# Altium PCB LineInjectorSimplePCB.PcbDoc
Units mm, origin at the board's own origin, x right, y up, seen from the top; angles counter-clockwise.
Board outline 87.5 x 80 mm, 2 copper layers (Top Layer, Bottom Layer); 35 components, 16 nets, 91 pads, 128 vias.
Unrouted connection lines stored in the file: 2.
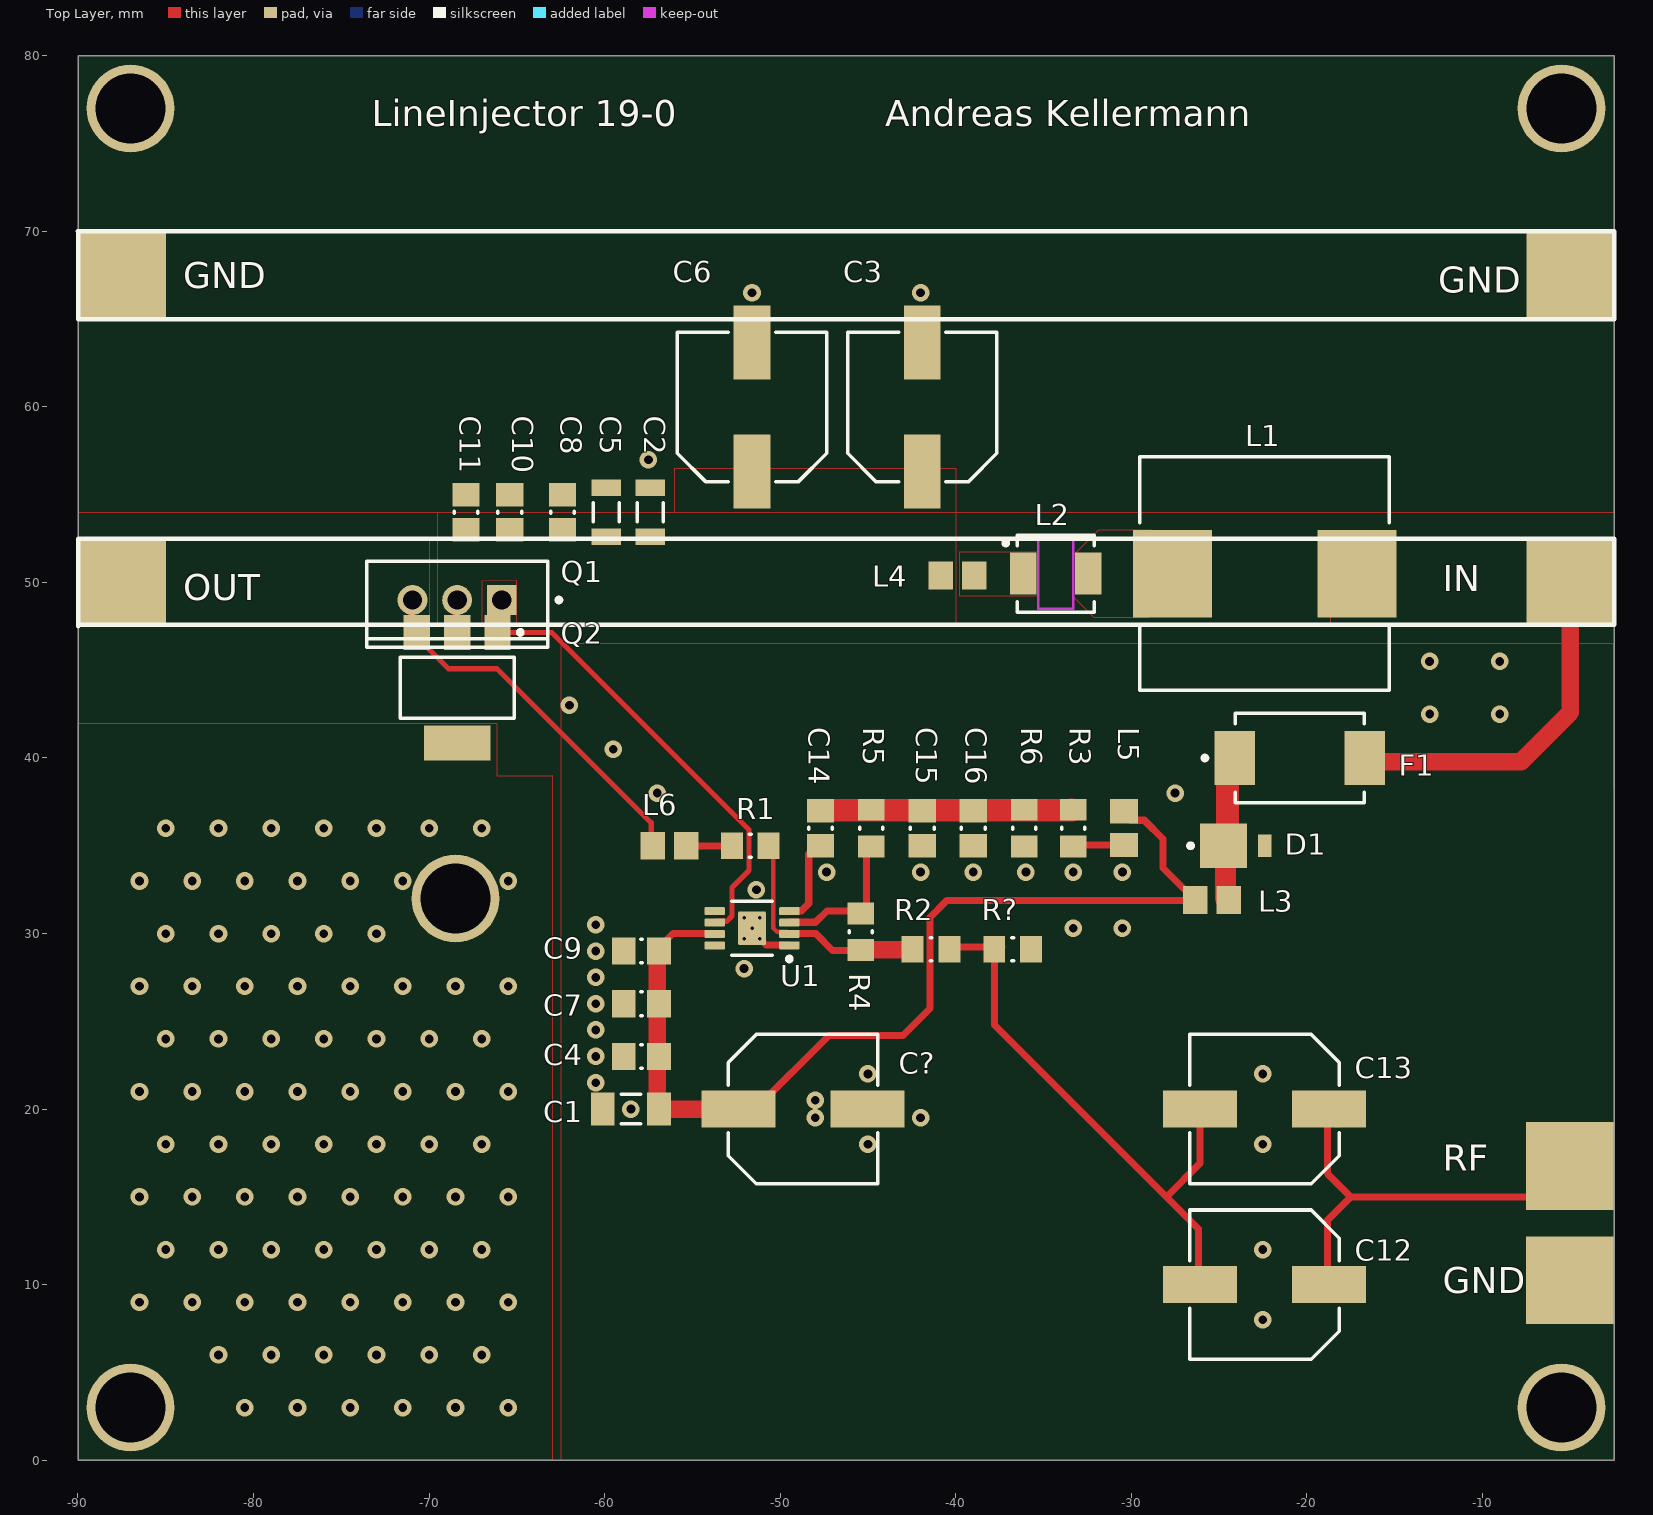
[diagram p0: Top Layer view]
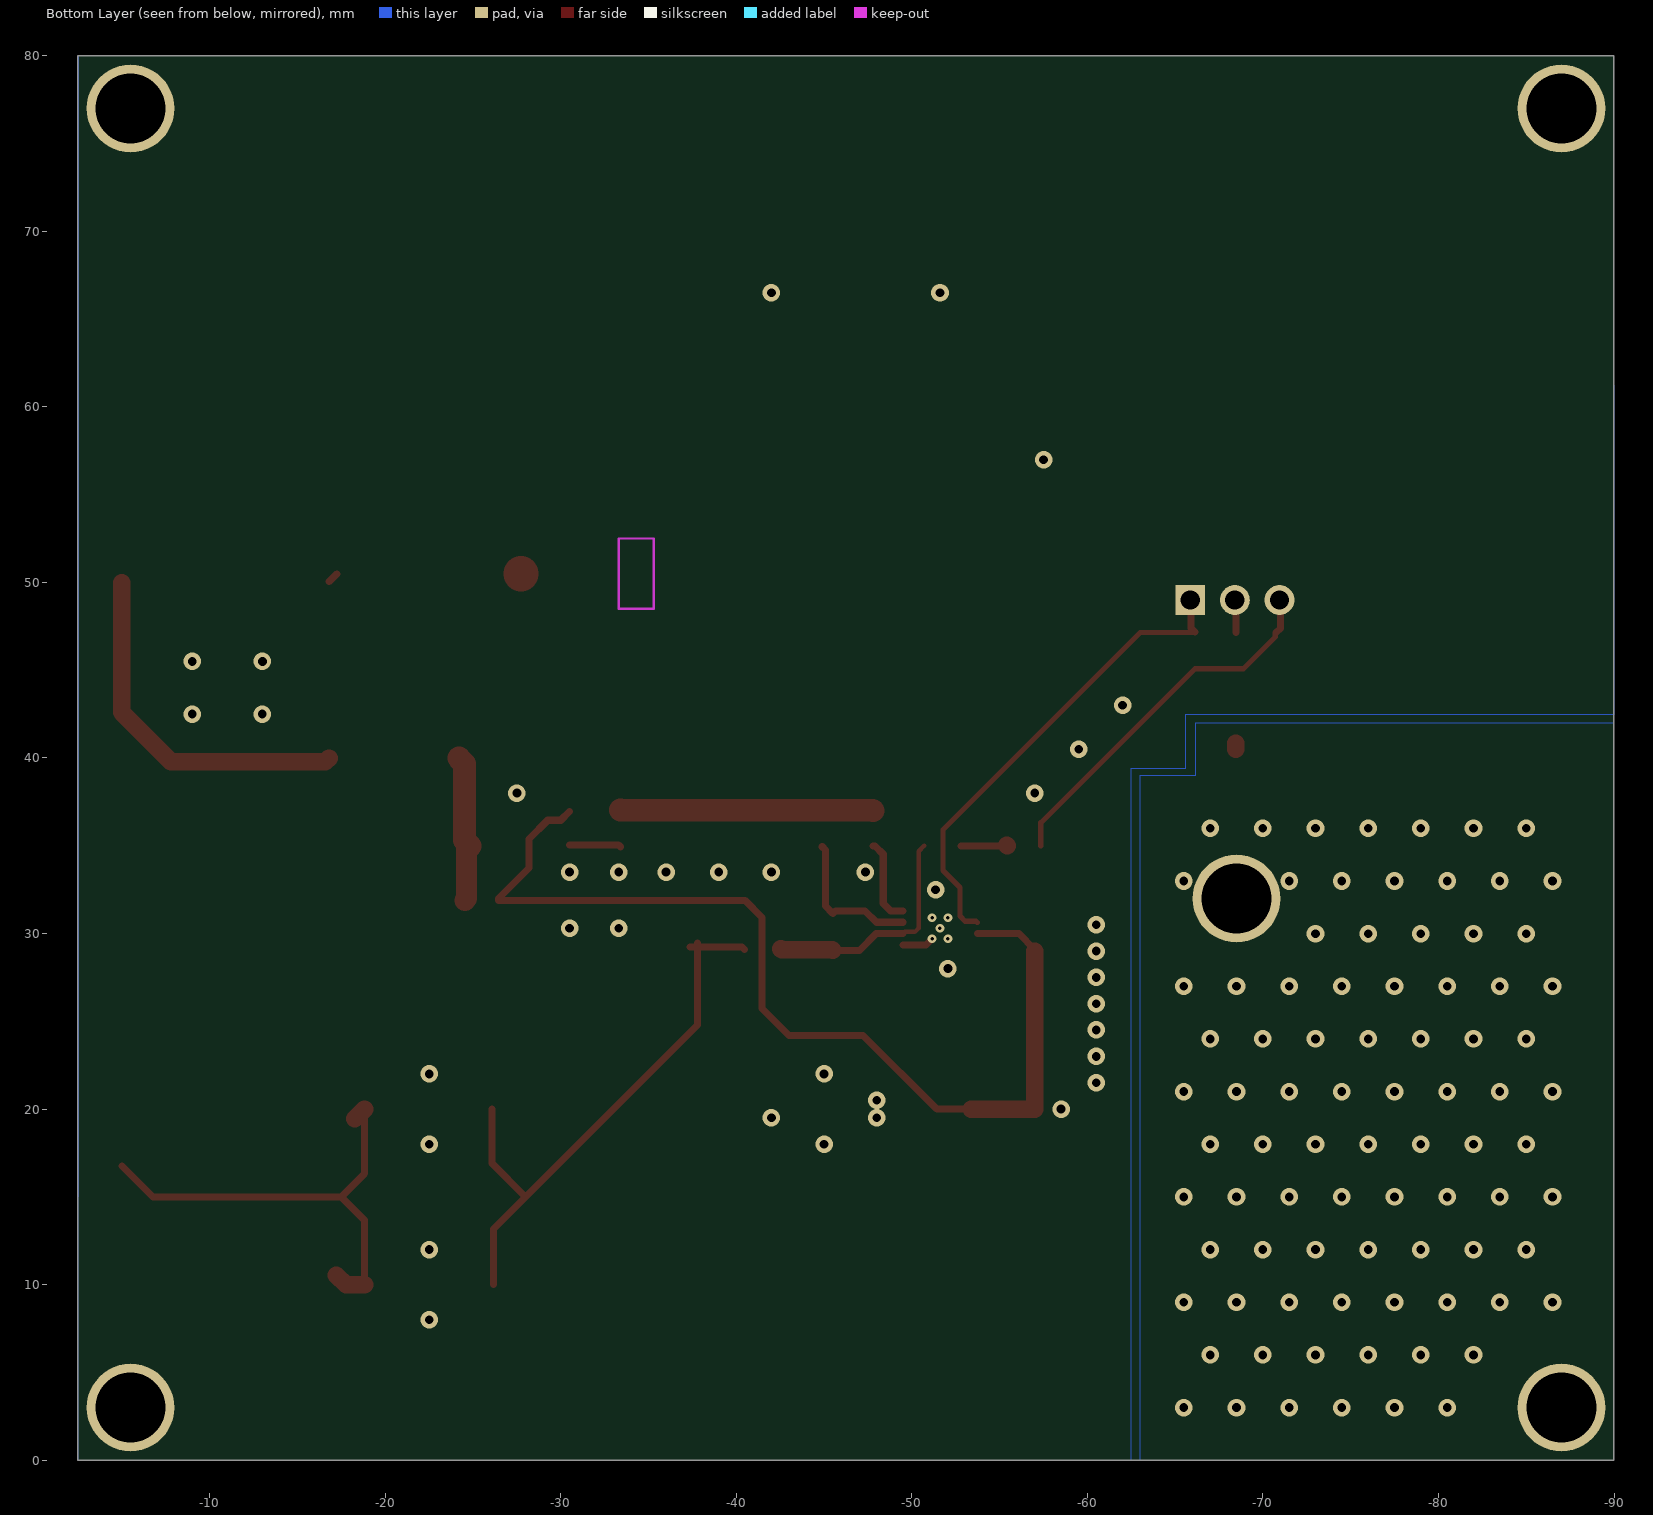
[diagram p1: Bottom Layer view, seen from below]

## Layer stack, top to bottom
Top Solder: solder mask 0.0102, Solder Resist, Dk 3.5
Top Layer: signal copper 0.0356
Dielectric 1: dielectric 0.32, FR-4, Dk 4.8
Bottom Layer: signal copper 0.0356
Bottom Solder: solder mask 0.0102, Solder Resist, Dk 3.5

## Board outline
-2.493,79.993 -2.493,39.993 -2.493,-0.007 -89.993,-0.007 -89.993,79.993

## Design rules (kind name [scope] priority, off if disabled: settings)
Clearance [All] p1: gap=0.2 ignorepadtopadclearanceinfootprint=FALSE
PlaneConnect [All] p1: planeconnectstyle=Direct reliefexpansion=0.508 reliefentries=4 reliefconductorwidth=0.254 reliefairgap=0.254
PolygonConnect [All] p1: connectstyle=Direct reliefconductorwidth=0.254 reliefentries=4 polygonreliefangle="90 Angle" airgapwidth=0.254
RoutingVias [All] p1: holewidth=0.4 width=0.7 viastyle="Through Hole" minholewidth=0.4 minwidth=0.7 maxholewidth=1 maxwidth=2
SolderMaskExpansion [All] p1: expansion=0.102
Width [All] p1: maxlimit=10 minlimit=0.254 preferedwidth=0.254
29 further rules are at their usual default settings.

## Components (designator, comment, footprint, x,y, rotation, side; value= is the part's Value field where it differs from the comment)
C1 "10uF" CAPC1206(3216)130_M -58.5,20 r180 top
C2 "10uF" CAPC1206(3216)130_L -57.4,54 r90 top
C3 "EEE-FK1E221P" PNSC-EEE-FK1E221P_N -41.9,60 r90 top
C4 "1uF" CAPC0805(2012)75_M -57.9,23 r0 top value=10nF
C5 "10uF" CAPC1206(3216)130_L -59.9,54 r90 top
C6 "EEE-FK1E221P" PNSC-EEE-FK1E221P_N -51.6,60 r90 top
C7 "100nF" CAPC0805(2012)75_M -57.9,26 r0 top value=10nF
C8 "1uF" CAPC0805(2012)75_M -62.4,54 r270 top value=10nF
C9 "10nF" CAPC0805(2012)75_M -57.9,29 r0 top
C10 "100nF" CAPC0805(2012)75_M -65.4,54 r270 top value=10nF
C11 "10nF" CAPC0805(2012)75_M -67.9,54 r270 top
C12 "EEE-FK1E221P" PNSC-EEE-FK1E221P_N -22.4,10 r180 top
C13 "220uF" PNSC-EEE-FK1E221P_N -22.4,20 r180 top
C14 "10nF" CAPC0805(2012)75_M -47.7,36 r90 top
C15 "100nF" CAPC0805(2012)75_M -41.9,36 r90 top value=10nF
C16 "1uF" CAPC0805(2012)75_M -39,36 r90 top value=10nF
C? "EEE-FK1E221P" PNSC-EEE-FK1E221P_N -48.7,20 r0 top
D1 "MBRM120LT3" ONSC-POWERMITE-2-457-04_D_V -23.4,35 r0 top
F1 "0ZCF0110FF2C" TECO-SMD100F-2_V -20.4,40 r0 top
L1 "7443550101" WE-HCI-1350 -22.4,50.5 r0 top
L2 "744373240010" "WE-LHMI 4020" -34.3,50.5 r0 top
L3 "0805" INDC2013X105X50ML20T30 -25.4,31.9 r0 top
L4 "0805" INDC2013X105X50ML20T30 -39.9,50.4 r0 top
L5 "0805" INDC2013X105X50ML20T30 -30.4,36 r90 top
L6 "0805" INDC2013X105X50ML20T30 -56.3,35 r180 top
Q1 "2SB1259" ONSC-TO-220-3-221A-09 -68.4,49 r270 top
Q2 "BSP19AT1" ONSC-SOT-223-4-318E-04_V -68.4,44 r270 top
R1 "1k" RESC0805(2012)_M -51.7,35 r180 top value="1780.00 Ohm"
R2 "1k" RESC0805(2012)_M -41.4,29.1 r180 top value="1780.00 Ohm"
R3 "1k" RESC0805(2012)_M -33.3,36 r270 top value="1780.00 Ohm"
R4 "open" RESC0805(2012)_M -45.4,30.1 r270 top value="1780.00 Ohm"
R5 "1k" RESC0805(2012)_M -44.8,36 r270 top value="1780.00 Ohm"
R6 "1k" RESC0805(2012)_M -36.1,36 r90 top value="1780.00 Ohm"
R? "49" RESC0805(2012)_M -36.75,29.1 r180 top value="1780.00 Ohm"
U1 "THS3120IDGN" DGN0008D_L -51.6,30.3 r180 top

## Footprints (in the part's own frame and the unit in brackets; to place one, negate y for a bottom-side part, rotate by r counter-clockwise, add the part's x,y. Pads: shape width x height; smd on the part's side, far side on the other; paste and mask are expansions set on the pad)
CAPC0805(2012)75_M [mm] "Chip Capacitor, Body 2.0x1.2mm, Height 0.75mm, IPC Low Density"
  rect 1.35x1.55 smd: 1(-1,0) 2(1,0)
  silkscreen extent -0.05,-0.67 0.05,0.67, body extent -1.1,-0.72 1.1,0.72, height 0.75
CAPC1206(3216)130_L [mm] "Chip Capacitor, Body 3.2x1.6mm, Height 1.3mm, IPC High Density"
  rect 0.95x1.7 smd: 1(-1.4,0) 2(1.4,0)
  silkscreen extent -0.55,-0.75 0.55,0.75, body extent -1.7,-0.9 1.7,0.9, height 1.3
CAPC1206(3216)130_M [mm] "Chip Capacitor, Body 3.2x1.6mm, Height 1.3mm, IPC Low Density"
  rect 1.35x1.9 smd: 1(-1.6,0) 2(1.6,0)
  silkscreen extent -0.55,-0.85 0.55,0.85, body extent -1.7,-0.9 1.7,0.9, height 1.3
DGN0008D_L [mm] "TSOP, 8-Leads, Body 3.1x3.1mm, Pitch 0.65mm, Thermal Pad 1.89x1.57mm, IPC High Density"
  rrect22% 1.15x0.45 smd: 1(-2.125,0.975) 2(-2.125,0.325) 3(-2.125,-0.325) 4(-2.125,-0.975) 5(2.125,-0.975) 6(2.125,-0.325) 7(2.125,0.325) 8(2.125,0.975)
  rrect6% 1.57x1.89 smd: 9(0,0)
  silkscreen extent -2.25,-1.55 1.15,1.87, body extent -2.45,-1.5 2.45,1.5, height 0.94
INDC2013X105X50ML20T30 [mm] "Chip Inductor, 2-Leads, Body 2.2x1.45mm, IPC Low Density"
  rect 1.39x1.59 smd: 1(-0.955,0) 2(0.955,0)
  body extent -1.1,-0.72 1.1,0.72, height 1.05
ONSC-POWERMITE-2-457-04_D_V [mm] "POWERMITE, 2-Leads, Body 1.965x1.9mm"
  rect 2.67x2.54 smd: 1(-1.335,0)
  rect 0.762x1.27 smd: 2(1.016,0)
  silkscreen extent -3.34,-0.12 -3.09,0.12, body extent -2.04,-0.95 -0.08,0.95, height 1.15
ONSC-SOT-223-4-318E-04_V [mm] "SOT223, 4-Leads, Body 6.5x3.5mm, Pitch 2.3mm"
  rect 2x1.5 smd: 1(-3.15,2.3) 2(-3.15,0) 3(-3.15,-2.3)
  rect 2x3.8 smd: 4(3.15,0)
  silkscreen extent -3.27,-3.25 1.75,3.73, body extent -1.75,-3.25 1.75,3.25, height 1.75
ONSC-TO-220-3-221A-09 [mm] "FM, 3-Leads, Body 10.3x4.85mm, Pitch 2.54mm"
  rect 1.7x1.7 hole 1.1: 1(0,2.54)
  round 1.7 hole 1.1: 2(0,0) 3(0,-2.54)
  silkscreen extent -2.2,-5.15 2.7,5.93, body extent -2.18,-5.15 2.67,5.15, height 19.85
PNSC-EEE-FK1E221P_N [mm] "CAPAE, 2-Leads, Dia 8mm, Body Length 10.5mm, IPC Medium Density"
  rect 4.2x2.1 smd: 1(-3.675,0) 2(3.675,0)
  silkscreen extent -4.25,-4.25 4.25,4.25, body extent -5,-4.25 5,4.25, height 10.5
RESC0805(2012)_M [mm] "Chip Resistor, Body 2.0x1.3mm, IPC Low Density"
  rect 1.25x1.5 smd: 1(-1.05,0) 2(1.05,0)
  silkscreen extent -0.05,-0.65 0.05,0.65, body extent -1.1,-0.67 1.1,0.67, height 0.7
TECO-SMD100F-2_V [mm] "SMD, 2-Leads, Body 7.34x5.12mm"
  rect 2.3x3.1 smd: 1(-3.7,0) 2(3.7,0)
  silkscreen extent -5.52,-2.56 3.68,2.56, body extent -3.67,-2.56 3.67,2.56, height 3
WE-HCI-1350 [mm] "Inductor, 2-Leads, Body 13.0 x 12.8 mm"
  rect 4.5x5 smd: 1(-5.25,0) 2(5.25,0)
  silkscreen extent -7.1,-6.65 7.1,6.65, body extent -7,-6.4 7,6.4, height 4.99
"WE-LHMI 4020" [mm] "SMD Inductor, 2-Leads, Body 4.45 x 4.06mm"
  rect 1.5x2.4 smd: 1(-1.85,0) 2(1.85,0)
  Keep-Out Layer lines w0.127: -1,-2 -1,2 1,2 1,-2 -1,-2
  silkscreen extent -2.97,-2.2 2.2,2.2, body extent -2.22,-2.03 2.23,2.03, height 1.8

## Part data
C1 C2 C5: library part CMP-1037-04970-1, Case-EIA=1206, Case-Metric=3216, Rated Voltage="10 V", Tolerance="-20% to +80%", Max Thickness="1.3 mm", Technology=SMT
C3 C6 C12 C?: library part CMP-1665-00017-1, "CAP ALUM 220UF 20% 25V SMD", Datasheet=http://industrial.panasonic.com/cdbs/www-data/pdf/RDE0000/ABA0000C1181.pdf, PartNumber=EEE-FK1E221P
C4 C7 C8 C9 C10 C11 C14 C15 C16: library part CMP-1036-03812-1, Case-EIA=0805, Case-Metric=2012, Rated Voltage="10 V", Tolerance="-20% to +80%", Max Thickness="0.75 mm", Technology=SMT
C13: library part CMP-1665-00017-1, "CAP ALUM 220UF 20% 25V SMD EEE-FK1E221P", PartNumber=EEE-FK1E221P, Datasheet=http://industrial.panasonic.com/cdbs/www-data/pdf/RDE0000/ABA0000C1181.pdf
D1: library part CMP-1055-00282-1, "Schottky Power Rectifier, 2-Pin Powermite, Tape and Reel", Manufacturer="On Semiconductor", ComponentLink1Description="Manufacturer URL", ComponentLink1URL=http://www.onsemi.com/, ComponentLink2Description=Datasheet, ComponentLink2URL=http://www.onsemi.cn/pub_link/Collateral/MBRM120L-D.PDF, ComponentLink3Description="Package Specification", ComponentLink3URL=http://www.onsemi.com/pub_link/Collateral/457-04.PDF, Configuration=Single, DatasheetVersion="Rev. 7", IFSM Max (A)=50, Mounting Technology="Surface Mount", Note1=0, PackageDescription="2-Pin POWERMITE, Body 1.965 x 1.9 mm", PackageReference=POWERMITE-2-457-04, PackageVersion="Rev. F, 05/2013", Packing="Tape and Reel", PartNumber=MBRM120LT3, RoHS=FALSE
F1: library part CMP-2000-05420-1, "ptc", Hold Current=1.1A, Manufacturer=TEConnectivity/CircuitProtection, Maximum Current Rating=40A, Maximum Initial Resistance=N/A, Maximum Post Trip Resistance=0.48Ohm, Maximum Voltage Rating=30V, Minimum Initial Resistance=0.12Ohm, Operating Temperature=85(Max)C, Package/Case=2920, Package Description="2-Pin Surface Mount Device, Body 7.34 x 5.12 mm", Package Reference=SMD100F-2, Trip Current=2.2A, Typical Power Dissipation=1.7(Max)W, Agency Approvals=CSA/TUV/UL, Applications=N/A, Datasheet URL=http://datasheet.octopart.com/SMD100F-2-Tyco-Electronics-datasheet-11085073.pdf, Datasheet Version=May-11, Dimension=N/A, Family=SMD, Lead Diameter=N/R, Manufacturer URL=http://www.te.com/, Maximum Trip Time=N/A, Mounting=SurfaceMount, Number of Terminals=2, Packaging=TapeandReel, Part No=SMD100F-2, RoHS=Yes, Seated Plane Height=N/R, Terminal Pitch=N/A, Wire Form=N/R
L1: library part CMP-0226-00031-1, "SMD Flat Wire High Current Inductor WE-HCI, L=10.0 µH", Inductance="10.0 µH", ComponentLink1Description="Manufacturer Link", ComponentLink1URL=http://www.we-online.com, ComponentLink2Description=Datasheet, ComponentLink2URL=http://www.we-online.de/katalog/media/pdf/7443550101.pdf, DatasheetVersion="ver 1, Aug-2009", PackageDescription="Inductor, 2-Leads, Body 13.0 x 12.8 mm", PackageReference=WE-HCI-1350, PackageVersion=2008
L2: library part CMP-1353-00038-1, "SMD Power Inductor WE-LHMI, L=0.10 µH", Inductance="0.10 µH", Manufacturer="Wuerth Elektronik", ComponentLink1Description="Manufacturer URL", ComponentLink1URL=http://www.we-online.com, ComponentLink2Description=Datasheet, ComponentLink2URL=http://katalog.we-online.de/kataloge/eisos/media/pdf/744373240010.pdf, PackageReference="WE-LHMI 4020", PartNumber=744373240010
L3 L4 L5 L6: library part CMP-1660-00003-1, Case Code (Metric)=2012, Current Rating="6 A", Max Operating Temperature="125 degC", Min Operating Temperature="-40 degC", Package Quantity=1, Resistance="4 mohm", Tolerance=30%, Case\Package=0805, Case Code (Imperial)=0805, ComponentLink1Description="Manufacturer URL", ComponentLink1URL=http://www.t-yuden.com/, ComponentLink2Description=Datasheet, ComponentLink2URL=http://ds.yuden.co.jp/TYCOMPAS/ut/detail.do?productNo=FBMJ2125HM210NT&fileName=FBMJ2125HM210NT_SS&mode=specSheetDownload, Core Material=Ferrite, DatasheetVersion=08/2016, Height="0.85 mm", Impedance="21 Ohm", Length="2 mm", Max Current Rating="6 A", Mount="Surface Mount", Mounting Technology="Surface Mount", PackageDescription="2-Pin Surface Mount Device, Body 2 x 1.25 mm", PackageReference=0805, Packaging="Tape and Reel", REACH SVHC=Unknown, RoHSCompliant=true, Width="1.25 mm"
Q1: library part CMP-1031-00034-1, Manufacturer="On Semiconductor", PartNumber=MJE5740G, ComponentLink1Description="Manufacturer URL", ComponentLink1URL=http://www.onsemi.com/, ComponentLink2Description=Datasheet, ComponentLink2URL=http://www.onsemi.com/pub_link/Collateral/MJE5740-D.PDF, ComponentLink3Description="Package Specification", ComponentLink3URL=http://www.onsemi.com/pub_link/Collateral/221A-09.PDF, DatasheetVersion="Rev. 11", IC Continuous (A)=8, Mounting Technology="Through Hole", PackageDescription="3-Pin Flange Mount, Vertical Straight Lead, Body 9.97 x 4.445 mm, Pitch 2.54 mm", PackageReference=TO-220-3-221A-09, PackageVersion="Rev. AG, 09/2011", Packing=Tube, Polarity=NPN, RoHS=TRUE
Q2: library part CMP-1048-00457-1, "NPN Silicon Expitaxial Transistor, 4-Pin SOT-223, Tape and Reel", Manufacturer="On Semiconductor", ComponentLink1Description="Manufacturer URL", ComponentLink1URL=http://www.onsemi.com/, ComponentLink2Description=Datasheet, ComponentLink2URL=http://www.onsemi.com/pub_link/Collateral/BSP19AT1-D.PDF, ComponentLink3Description="Package Specification", ComponentLink3URL=http://www.onsemi.com/pub_link/Collateral/318E-04.PDF, DatasheetVersion="Rev. 11", fT Min (MHz)=70, IC Continuous (A)=0.1, Mounting Technology="Surface Mount", PackageDescription="4-Pin Small Outline Transistor, Body 6.5 x 3.5 mm, Pitch 2.3 mm", PackageReference=SOT-223-4-318E-04, PackageVersion="Rev. N, 08/2009", Packing="Tape and Reel", PartNumber=BSP19AT1, Polarity=NPN, RoHS=FALSE
R1 R2 R3 R5 R6 R?: library part CMP-1013-00536-1, "1k 1%", Case-EIA=0805, Case-Metric=2012, Power="0.125 W", Tolerance="1 %", Technology=SMT
R4: library part CMP-1013-00536-1, Case-EIA=0805, Case-Metric=2012, Power="0.125 W", Tolerance="1 %", Technology=SMT
U1: library part CMP-0018-00648-2, "Single, Low Noise, High Output Drive, 475 mA Current-Feedback Amplifier with Power-Down, 10 to 30 V, -40 to 85 degC, 8-pin SOP (DGN8), Green (RoHS & no Sb/Br)", Manufacturer="Texas Instruments", 2nd Harmonic(dBc)=51, 3rd Harmonic(dBc)=50, @ MHz=10, Acl, min stable gain(V/V)=1, BW @ Acl(MHz)=130, Code_JEDEC=MO-187, ComponentLink1Description="Manufacturer URL", ComponentLink1URL=http://www.ti.com/, ComponentLink2Description=Datasheet, ComponentLink2URL=http://www.ti.com/general/docs/lit/getliterature.tsp?genericPartNumber=THS3120&fileType=pdf, ComponentLink3Description="Package Specification", ComponentLink3URL=http://www.ti.com/litv/pdf/mpds046e, DatasheetVersion=SLOS420E, Diff Gain(%)=0.007, Diff Phase(deg)=0.018, Eco-Plan="Green (RoHS & no Sb/Br)", Iib(Max)(nA)=20000, Io(Typ)(mA)=475, Iq per channel(Max)(mA)=11, Mounting Technology="Surface Mount", Number of Channels=1, PackageDescription="8-pin Plastic Small Outline, Body 3 x 3 mm, Pitch 0.65 mm", PackageReference=DGN0008D, PackageVersion="4073271/F, 05/2011", PartNumber=THS3120IDGN, Settling Time (0.1%)(Typ)(ns)=11, Slew Rate(Typ)(V/us)=1700, Sub Family="High Output Current Amplifier (>=50mA), High Speed Amplifier (>=50MHz), High Supply Voltage Amplifier (>=30V)", THD (Fc is 1 MHz)(Typ)(dB)=-78, Vio(Max)(mV)=8, Vn at Flatband(Typ)(nV/rtHz)=2.5, Vs(Max)(V)=30, Vs(Min)(V)=10

## Free pads (board coordinates)
  round 5 hole 4: 1(-68.493,31.993) 6(-5.493,2.993) 7(-87,2.993) 8(-87,77) 9(-5.493,77)
  rect 5x5 smd: 1(-4.993,49.993) 2(-4.993,67.493) 3(-5,10.25) 3(-5,16.75) 4(-87.493,67.493) 5(-87.493,49.993)

## Via types
v1: diameter 1, hole 0.5, Top Layer to Bottom Layer, tented both sides, 123 vias
v2: diameter 0.5, hole 0.2, Top Layer to Bottom Layer, tented both sides, 5 vias

## Nets (pads, with @x,y where several pads share a name; then routed paths per layer and width w, separated by ;. In a path a pad name is that pad's centre, name@x,y a point inside that pad or via, vN(x,y) a via of type N, cw(c..) or ccw(c..) an arc to the next point about the centre after c; other vN are vias at no path point)
AC_Input: C12.1 C13.1 pad.3@-5,16.75 | length 26.9
  Top Layer w0.4: C12.1@-18.818,9.993 -18.818,13.668 -17.493,14.993 ; C13.1@-18.818,19.993 -18.818,16.318 -17.493,14.993 ; pad.3@-5,16.75 -6.757,14.993 -17.493,14.993
  Top Layer w1: C12.1@-18.818,9.993 -17.768,9.993 C12.1@-17.218,10.543 ; C13.1@-18.818,19.993 C13.1@-18.268,19.443
GND: C1.2 C2.2 C3.2 C4.1 C5.2 C6.2 C7.1 C8.1 C9.1 C10.1 C11.1 C14.1 C15.1 C16.1 C?.2 D1.2 pad.2 pad.3@-5,10.25 pad.4 pad.6 pad.7 pad.8 pad.9 R6.1 R?.1 U1.1 U1.4 U1.8 U1.9 | length 6.7
  Top Layer w0.4: U1.9@-51.168,29.718 -50.793,29.343 U1.1@-49.493,29.343 ; U1.4@-49.493,31.293 -48.793,31.293 -48.368,31.718 -48.368,34.518 -47.893,34.993 C14.1@-47.793,34.993
  other v1: -22.5,8 -22.5,11.993 -45,18 -22.5,17.993 -48,19.5 -42,19.5 -58.5,20 -48,20.5 -60.5,21.5 -45,22 -22.5,22 -60.5,23 -60.5,24.509 -60.5,26 -60.5,27.5 -52.05,28 -60.5,29 -33.3,30.3 -30.5,30.3 -60.5,30.5 -51.35,32.5 -47.35,33.5 -42,33.5 -39,33.5 -36,33.5 -33.3,33.5 -30.5,33.5 -57,38 -27.5,38 -59.5,40.5 -12.993,42.5 -9,42.5 -62,43 -13,45.5 -9,45.5 -57.5,56.993 -51.6,66.5 -42,66.5
  other v2: -52.05,29.7 -51.15,29.7 -51.6,30.3 -52.05,30.9 -51.15,30.9
NetC1_1: C1.1 C4.2 C7.2 C9.2 C?.1 L3.1 L5.2 U1.7 | length 58.4
  Top Layer w0.4: C9.2@-56.993,28.993 -56.993,29.093 -56.093,29.993 U1.7@-53.743,29.993 ; C?.1@-53.37,19.993 -52.468,19.993 -51.418,19.993 -47.218,24.193 -42.993,24.193 -41.468,25.718 -41.468,30.918 -40.493,31.893 -26.448,31.893 -26.448,31.993 -28.193,33.738 -28.193,35.393 -29.253,36.453 -29.998,36.453 L5.2@-30.493,36.948
  Top Layer w1: C9.2@-56.993,28.993 -56.993,22.993 -56.993,19.993 C?.1@-53.37,19.993
NetC2_1: C2.1 C3.1 C5.1 C6.1 C8.2 C10.2 C11.2 L4.1 pad.1@-68.493,31.993 Q1.2 Q2.2 Q2.4 | length 2.2
  Top Layer w0.4: Q2.2@-68.453,47.143 Q1.2@-68.453,48.993
  Top Layer w1: Q2.4@-68.453,40.493 Q2.4@-68.453,40.843
  other v1: -80.493,2.993 -77.493,2.993 -74.493,2.993 -71.493,2.993 -68.493,2.993 -65.493,2.993 -81.993,5.993 -78.993,5.993 -75.993,5.993 -72.993,5.993 -69.993,5.993 -66.993,5.993 -86.493,8.993 -83.493,8.993 -80.493,8.993 -77.493,8.993 -74.493,8.993 -71.493,8.993 -68.493,8.993 -65.493,8.993 -84.993,11.993 -81.993,11.993 -78.993,11.993 -75.993,11.993 -72.993,11.993 -69.993,11.993 -66.993,11.993 -86.493,14.993 -83.493,14.993 -80.493,14.993 -77.493,14.993 -74.493,14.993 -71.493,14.993 -68.493,14.993 -65.493,14.993 -84.993,17.993 -81.993,17.993 -78.993,17.993 -75.993,17.993 -72.993,17.993 -69.993,17.993 -66.993,17.993 -86.493,20.993 -83.493,20.993 -80.493,20.993 -77.493,20.993 -74.493,20.993 -71.493,20.993 -68.493,20.993 -65.493,20.993 -84.993,23.993 -81.993,23.993 -78.993,23.993 -75.993,23.993 -72.993,23.993 -69.993,23.993 -66.993,23.993 -86.493,26.993 -83.493,26.993 -80.493,26.993 -77.493,26.993 -74.493,26.993 -71.493,26.993 -68.493,26.993 -65.493,26.993 -84.993,29.993 -81.993,29.993 -78.993,29.993 -75.993,29.993 -72.993,29.993 -86.493,32.993 -83.493,32.993 -80.493,32.993 -77.493,32.993 -74.493,32.993 -71.493,32.993 -68.493,32.993 -65.493,32.993 -84.993,35.993 -81.993,35.993 -78.993,35.993 -75.993,35.993 -72.993,35.993 -69.993,35.993 -66.993,35.993
NetC12_2: C12.2 C13.2 R2.1 R?.2 | length 33
  Top Layer w0.4: R2.1@-40.468,29.093 -40.318,29.243 R?.2@-38.036,29.243 ; R?.2@-37.793,29.457 R?.2@-37.793,29.225 ; R?.2@-37.357,29.232 -37.357,29.225 R?.2@-37.793,29.225 ; C12.2@-26.168,9.993 -26.168,13.168 -27.993,14.993 ; C13.2 -26.075,16.911 -27.993,14.993 ; R?.2@-37.793,29.225 -37.793,24.793 -27.993,14.993
NetC14_2: C14.2 C15.2 C16.2 R3.1 R5.1 R6.2 | length 14.4
  Top Layer w1.3: C14.2@-47.793,36.993 -47.768,37.018 -33.418,37.018 R3.1@-33.393,37.043
NetD1_1: D1.1 F1.1 L3.2 | length 8.5
  Top Layer w1.2: D1.1@-24.828,34.993 -24.633,34.798 -24.633,31.988 L3.2@-24.538,31.893
  Top Layer w1.3: D1.1@-24.828,34.993 -24.511,35.31 -24.511,39.675 F1.1@-24.193,39.993
NetL1_1: L1.1 L2.2 | length 0
NetL2_1: L2.1 L4.2
NetL5_1: L5.1 R3.2 | length 2.9
  Top Layer w0.4: R3.2@-33.393,34.943 -33.298,35.038 L5.1@-30.493,35.038
NetL6_1: L6.1 R1.2 | length 2.7
  Top Layer w0.4: L6.1@-55.434,34.993 R1.2@-52.795,34.993
  Top Layer w1: L6.1@-55.434,34.993 L6.1@-55.409,35.018
NetQ1_1: Q1.1 Q2.1 U1.6 | length 27.3
  Top Layer w0.3: Q2.1 -63.011,47.15 -51.77,35.908 -51.77,33.585 -52.735,32.62 -52.735,30.999 -53.034,30.7 -53.65,30.7 U1.6
  Top Layer w0.4: Q2.1@-66.123,47.173 -65.913,47.383 Q1.1@-65.913,48.993
NetR1_1: R1.1 R2.2 R4.2 U1.2 | length 13.2
  Top Layer w0.254: R1.1@-50.695,34.993 -50.395,34.693 -50.395,30.311 -50.174,30.091 -49.591,30.091 U1.2@-49.493,29.993
  Top Layer w0.4: U1.2@-49.493,29.993 -47.968,29.993 -47.018,29.043 R4.2@-45.493,29.043
  Top Layer w1: R4.2@-45.493,29.043 -45.455,29.08 -42.581,29.08 -42.543,29.118 R2.2@-42.518,29.143
NetR4_1: R4.1 R5.2 U1.3 | length 8.4
  Top Layer w0.4: U1.3@-49.493,30.643 -47.981,30.643 -47.331,31.293 -45.643,31.293 -45.493,31.143 -45.068,31.568 -45.068,34.768 R5.2@-44.893,34.943
Power_Input: F1.2 L1.2 pad.1@-4.993,49.993 | length 21.1
  Top Layer w0.4: L1.2@-17.243,50.493 L1.2@-16.793,50.043
  Top Layer w1: F1.2@-16.793,39.993 -16.593,39.793 -7.793,39.793 -4.993,42.593 pad.1@-4.993,49.993
Power_Output: L6.2 pad.5 Q1.3 Q2.3 | length 21.3
  Top Layer w0.3: Q2.3 -70.7,46.9 -68.885,45.085 -66.123,45.085 -57.344,36.306 L6.2@-57.344,34.993
  Top Layer w0.4: Q1.3@-70.993,48.993 -70.993,47.383 Q2.3@-70.753,47.143
pads on no net: U1.5

## Polygon pours and split planes (outlines as drawn)
GND on Top Layer "Top Layer-GND" (solid, remove dead copper, shelved, pour order 20): -2.5,46.5 -62.5,46.5 -62.5,0 -2.493,0 -2.493,30
NetC1_1 on Top Layer "Top Layer-NetC1_1" (solid, remove dead copper, shelved, pour order 18): -2.493,79.993
NetC2_1 on Top Layer "Top Layer-NetC2_1" (solid, remove dead copper, shelved, pour order 14): -66.153,41.993 -66.153,38.993 -62.993,38.993 -62.993,-0.007 -89.993,-0.007 -89.993,41.993
NetL2_1 on Top Layer "Top Layer-NetL2_1" (solid, remove dead copper, shelved, pour order 12): -35.363,51.763 -35.363,49.216 -39.754,49.216 -39.754,51.763
NetL1_1 on Top Layer "Top Layer-NetL1_1" (solid, remove dead copper, shelved, pour order 10): -28.893,52.993 -28.993,52.893 -28.993,47.993 -32.099,47.993 -33.298,49.192 -33.298,51.539 -31.845,52.993
NetC2_1 on Top Layer "Top Layer-NetC2_1 1" (solid, remove dead copper, shelved, pour order 0): -69.493,47.493 -69.493,53.993 -55.993,53.993 -55.993,56.493 -39.993,56.493 -39.993,47.493 -64.993,47.493 -64.993,50.12 -66.993,50.068 -66.993,47.493
Power_Output on Top Layer "Top Layer-Power_Output" (solid, remove dead copper, shelved, pour order 8): -89.993,52.493 -69.993,52.493 -69.993,47.493 -89.993,47.493
Power_Input on Top Layer "Top Layer-Power_Input" (solid, remove dead copper, shelved, pour order 6): -2.493,47.493 -2.493,52.493 -18.668,52.493 -18.668,47.493
no net on Top Layer "Top Layer-No Net" (solid, remove dead copper, shelved, pour order 4): -2.493,52.493
GND on Top Layer "Top Layer-GND 1" (solid, remove dead copper, shelved, pour order 2): -2.493,79.993 -89.993,79.993 -89.993,53.993 -2.493,53.993
GND on Bottom Layer "Bottom Layer-GND" (solid, remove dead copper, shelved, pour order 22): -2.5,79.993 -2.5,30 -2.493,0 -62.5,0 -62.5,39.406 -65.594,39.406 -65.594,42.5 -90,42.5 -89.993,79.993 -81.507,79.993
NetC2_1 on Bottom Layer "Bottom Layer-NetC2_1" (solid, remove dead copper, shelved, pour order 16): -89.993,41.993 -66.153,41.993 -66.153,38.993 -62.993,38.993 -62.993,-0.007 -89.993,-0.007

## Keep-outs
Top Layer:
  region: -62.993,38.993

## Silkscreen, mask and mechanical layers (free items; w line width, h text height)
Top Overlay:
  lines w0.254: -90,70 -89.993,69.993 -89.993,65 -2.493,65 -2.493,70 -90,70 ; -89.993,47.493 -89.893,47.593 -2.493,47.593 -2.493,52.493 -89.993,52.493 -89.993,48.698 -89.993,47.493
  text "LineInjector 19-0" at -73.25,76 h1.5
  text "Andreas Kellermann" at -44,76 h1.5
  text "GND" at -83.993,66.75 h1.5
  text "GND" at -12.5,66.5 h1.5
  text "IN" at -12.25,49.5 h1.5
  text "OUT" at -84,49 h1.5
  text "RF" at -12.25,16.5 h1.5
  text "GND" at -12.25,9.5 h1.5
Top Solder:
  rectangle: -73.5,23.993 -63.5,39
Bottom Solder:
  rectangle: -83,7.5 -64,38
Mechanical 2:
  lines w0.254: -90,0 -90,80 -2.5,80 -2.5,30 -2.5,20.014 -2.493,20.007 -2.493,9.993 -2.493,0 -90,0
Mechanical 3:
  lines w0.254: -2.493,41.263 -2.493,79.993 -89.993,79.993 -89.993,-0.007 -2.493,-0.007 -2.493,9.993 -2.493,19.993 -2.493,29.993 -2.493,42.493